# Altium PCB UBW32_MX460_v262.PcbDoc
Units mil, origin at the board's own origin, x right, y up, seen from the top; angles counter-clockwise.
Board outline 4390 x 1040 mil, 2 copper layers (Top, Bottom); 63 components, 100 nets, 331 pads, 96 vias.
Unrouted connection lines stored in the file: 49.
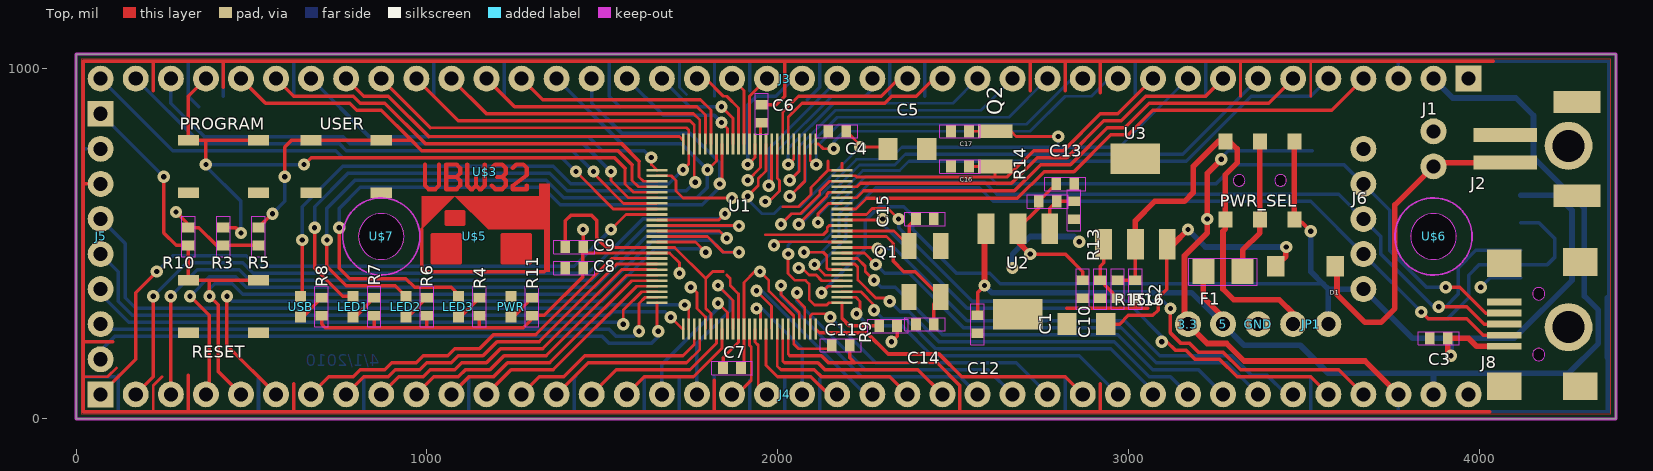
[diagram p0: Top view]
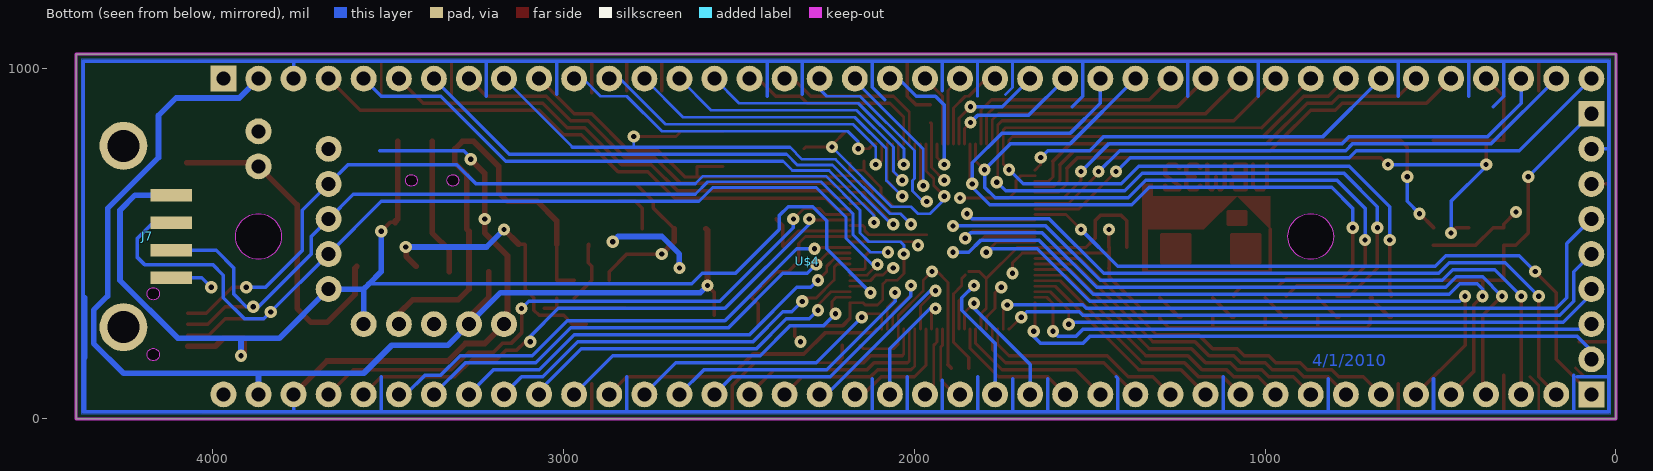
[diagram p1: Bottom view, seen from below]

## Layer stack, top to bottom
Top Solder: solder mask 0.4, Solder Resist, Dk 3.5
Top: signal copper 1.378
Dielectric 1: dielectric 12.6, FR-4, Dk 4.8
Bottom: signal copper 1.378
Bottom Solder: solder mask 0.4, Solder Resist, Dk 3.5

## Board outline
0,0 0,1040 4390,1040 4390,0
cut-out: 3870,455 ccw(c3870,520) 3935,520 ccw(c3870,520) 3870,585 ccw(c3870,520) 3805,520 ccw(c3870,520)
cut-out: 870,455 ccw(c870,520) 935,520 ccw(c870,520) 870,585 ccw(c870,520) 805,520 ccw(c870,520)
cut-out: 4170,165.68 ccw(c4170,183.39) 4187.72,183.39 ccw(c4170,183.39) 4170,201.1 ccw(c4170,183.39) 4152.28,183.39 ccw(c4170,183.39)
cut-out: 4170,338.89 ccw(c4170,356.61) 4187.72,356.61 ccw(c4170,356.61) 4170,374.32 ccw(c4170,356.61) 4152.28,356.61 ccw(c4170,356.61)
cut-out: 3315.94,663.27 ccw(c3315.94,680) 3332.67,680 ccw(c3315.94,680) 3315.94,696.73 ccw(c3315.94,680) 3299.21,680 ccw(c3315.94,680)
cut-out: 3434.06,663.27 ccw(c3434.06,680) 3450.79,680 ccw(c3434.06,680) 3434.06,696.73 ccw(c3434.06,680) 3417.33,680 ccw(c3434.06,680)

## Design rules (kind name [scope] priority, off if disabled: settings)
BoardOutlineClearance mdCopperDimension [All] p1: gap=10 ignorepadtopadclearanceinfootprint=FALSE except(0: Arc-SplitContinuation Track-SplitContinuation SMDPad-SplitContinuation THPad-SplitContinuation Via-SplitContinuation Fill-SplitContinuation Poly-SplitContinuation Region-SplitContinuation Text-SplitContinuation; 8: Poly-OutlineEdge Poly-CavityEdge Poly-CutoutEdge Poly-SplitBarrior)
Clearance Clearance_for_PolygonClass_Isolate_12 [InPolygonClass('Isolate_12') vs IsArc Or IsTrack Or IsPad Or IsVia Or IsFill Or IsRegion Or IsText] p1: gap=12 ignorepadtopadclearanceinfootprint=FALSE
Clearance "Clearance (Same Net)" [All] p2: gap=8 ignorepadtopadclearanceinfootprint=FALSE
Clearance [All] p3: gap=8 ignorepadtopadclearanceinfootprint=FALSE
HoleSize [All] p1: absolutevalues=TRUE maxlimit=100000 minlimit=15 maxpercent=80.000 minpercent=20.000
HoleToHoleClearance mdDrill [All] p1: gap=8 allowstackedmicrovias=TRUE
MinimumSolderMaskSliver [All] p1 off: minsoldermaskwidth=10
PasteMaskExpansion Expansion_SMDPaste_OFF [InPadClass('SMDPaste_OFF')] p1: expansion=0
PasteMaskExpansion mlMinCreamFrame [All] p2: expansion=0
PolygonConnect PolygonConnect_For_PolygonThermal_ON_Width100000_Gap100000 [InPolygonClass('PolygonThermal_ON_Width100000_Gap100000') vs Not IsVia] p1: connectstyle=Relief reliefconductorwidth=10 reliefentries=4 polygonreliefangle="90 Angle" airgapwidth=10
PolygonConnect ThermalVias [IsVia] p2: connectstyle=Direct reliefconductorwidth=10 reliefentries=4 polygonreliefangle="90 Angle" airgapwidth=10
PolygonConnect [All] p3: connectstyle=Relief reliefconductorwidth=10 reliefentries=4 polygonreliefangle="90 Angle" airgapwidth=10
RoutingVias [All] p1: holewidth=15 width=35 viastyle="Through Hole" minholewidth=15 minwidth=35 maxholewidth=100 maxwidth=100
SolderMaskExpansion mlMinStopFrame [All] p1: expansion=4 istentingtop=FALSE
Width [All] p1: maxlimit=10000 minlimit=8 preferedwidth=8
26 further rules are at their usual default settings.

## Classes and differential pairs
polygon class PolygonThermal_ON_Width100000_Gap100000: Polygon_1_Net_3.3V Polygon_1_Net_GND
polygon class Isolate_12: Polygon_1_Net_3.3V Polygon_1_Net_GND
pad class SMDPaste_OFF: U1-1 U1-2 U1-3 U1-4 U1-5 U1-6 U1-7 U1-8 U1-9 U1-10 U1-11 U1-12 U1-13 U1-14 U1-15 U1-16 U1-17 U1-18 U1-19 U1-20 U1-21 U1-22 U1-23 U1-24 U1-25 U1-26 U1-27 U1-28 U1-29 U1-30 U1-31 U1-32 U1-33 U1-34 U1-35 U1-36 U1-37 U1-38 U1-39 U1-40 U1-41 U1-42 U1-43 U1-44 U1-45 U1-46 U1-47 U1-48 U1-49 U1-50 U1-51 U1-52 U1-53 U1-54 U1-55 U1-56 U1-57 U1-58 U1-59 U1-60 U1-61 U1-62 U1-63 U1-64 U1-65 U1-66 U1-67 U1-68 U1-69 U1-70 U1-71 U1-72 U1-73 U1-74 U1-75 U1-76 U1-77 U1-78 U1-79 U1-80 U1-81 U1-82 U1-83 U1-84 U1-85 U1-86 U1-87 U1-88 U1-89 U1-90 U1-91 U1-92 U1-93 U1-94 U1-95 U1-96 U1-97 U1-98 U1-99 U1-100

## Components (designator, comment, footprint, x,y, rotation, side; value= is the part's Value field where it differs from the comment)
3.3 "" 1X01 3170,270 r0 top
5 "" 1X01 3270,270 r0 top
C1 "10uF" EIA3216 2880,270 r0 top
C2 "1uF" 0402-CAP 3020,370 r270 top
C3 "1uF" 0402-CAP 3885,230 r180 top
C4 "0.1uF" 0402-CAP 2170,820 r180 top
C5 "10uF" EIA3216 2370,770 r180 top
C6 "0.1uF" 0402-CAP 1955,870 r90 top
C7 "0.1uF" 0402-CAP 1870,145 r180 top
C8 "0.1uF" 0402-CAP 1420,430 r180 top
C9 "0.1uF" 0402-CAP 1420,490 r180 top
C10 "0.1uF" C0402 2870,370 r270 top
C11 "0.1uF" 0402-CAP 2180,210 r0 top
C12 "1uF" C0402 2570,270 r270 top
C13 "1uF" C0402 2820,670 r0 top
C14 "18pF" 0402-CAP 2420,270 r0 top
C15 "18pF" 0402-CAP 2420,570 r180 top
C16 "11pf" 0402-CAP 2520,720 r180 top
C17 "11pf" 0402-CAP 2520,820 r180 top
D1 "" SMA-DIODE 3505,435 r180 top
F1 "250mA PTC Fuse" R1206 3270,420 r180 top
GND "" 1X01 3370,270 r0 top
J1 "" 1X02 3870,820 r270 top
J2 "JST-2-PTH" S2B-PH 4220,770 r270 top
J3 "" 1X40 2020,970 r180 top
J4 "" 1X40 2020,70 r0 top
J5 "" 1X08 70,870 r270 top
J6 "" 1X05 3670,370 r90 top
J7 "" USB-A-S 4255,520 r180 bottom
J8 "USB-MINIB" USB-MINIB 4170,270 r180 top
JP1 "" 1X02 3470,270 r0 top
LED1 "WHITE" LED-0603 790,320 r0 top
LED2 "RED" LED-0603 940,320 r0 top
LED3 "YELLOW" LED-0603 1090,320 r0 top
PROGRAM "" TACTILE_SWITCH_SMD 420,720 r180 top
PWR "BLUE" LED-0603 1240,320 r0 top
PWR_SEL "AYZ0202" AYZ0202 3375,680 r0 top
Q1 "8MHz" CRYSTAL-SMD-5X3 2420,420 r90 top
Q2 "32.768KHz" CRYSTAL-32KHZ-SMD 2620,770 r270 top
R3 "10K" 0402-RES 420,520 r90 top
R4 "330" 0402-RES 1150,320 r270 top
R5 "10K" 0402-RES 520,520 r90 top
R6 "330" 0402-RES 1000,320 r270 top
R7 "330" 0402-RES 850,320 r270 top
R8 "330" 0402-RES 700,320 r270 top
R9 "10K" 0402-RES 2315,265 r0 top
R10 "10K" 0402-RES 320,520 r270 top
R11 "330" 0402-RES 1300,320 r270 top
R13 "390" 0402-RES 2845,595 r90 top
R14 "240" 0402-RES 2770,620 r0 top
R15 "715" 0402-RES 2920,370 r90 top
R16 "240" 0402-RES 2970,370 r270 top
RESET "" TACTILE_SWITCH_SMD 420,320 r180 top
U1 "" TQFP100 1920,520 r270 top
U2 "3.3V" SOT223 2685,420 r180 top
U3 "5V" SOT223 3020,620 r0 top
U$3 "" UBW32 1165,705 r0 top
U$4 "" SFE-NEW-WEBLOGO 2305,450 r180 bottom
U$5 "" SCHMALZHAUS 1135,520 r0 top
U$6 "" STAND-OFF 3870,520 r0 top
U$7 "" STAND-OFF 870,520 r0 top
USB "GREEN" LED-0603 640,320 r0 top
USER "" TACTILE_SWITCH_SMD 770,720 r180 top

## Footprints (in the part's own frame and the unit in brackets; to place one, negate y for a bottom-side part, rotate by r counter-clockwise, add the part's x,y. Pads: shape width x height; smd on the part's side, far side on the other; paste and mask are expansions set on the pad)
1X01 [mil] "1X01"
  round 74 hole 40: 1(0,0)
  body extent -37,-37 37,37, height 150
1X02 [mil] "1X02"
  round 74 hole 40: 1(0,0) 2(100,0)
  body extent -37,-37 137,37, height 150
1X05 [mil] "1X05"
  round 74 hole 40: 1(0,0) 2(100,0) 3(200,0) 4(300,0) 5(400,0)
  body extent -37,-37 437,37, height 150
1X08 [mil] "1X08"
  rect 74x74 / inner round 68.37 / far side rect 74x74 hole 40: 1(0,0)
  round 74 hole 40: 2(100,0) 3(200,0) 4(300,0) 5(400,0) 6(500,0) 7(600,0) 8(700,0)
  body extent -34,-37 737,37, height 150
1X40 [mil] "1X40"
  rect 74x74 / inner round 68.37 / far side rect 74x74 hole 40: 1(-1950,0)
  round 74 hole 40: 2(-1850,0) 3(-1750,0) 4(-1650,0) 5(-1550,0) 6(-1450,0) 7(-1350,0) 8(-1250,0) 9(-1150,0) 10(-1050,0) 11(-950,0) 12(-850,0) 13(-750,0) 14(-650,0) 15(-550,0) 16(-450,0) 17(-350,0) 18(-250,0) 19(-150,0) 20(-50,0) 21(50,0) 22(150,0) 23(250,0) 24(350,0) 25(450,0) 26(550,0) 27(650,0) 28(750,0) 29(850,0) 30(950,0) 31(1050,0) 32(1150,0) 33(1250,0) 34(1350,0) 35(1450,0) 36(1550,0) 37(1650,0) 38(1750,0) 39(1850,0) 40(1950,0)
  body extent -1984,-37 1987,37, height 150
0402-CAP [mm] "0402-CAP"
  rect 0.7x0.9 smd: 1(-0.65,0) 2(0.65,0)
  Top keep-out lines w0.051: 1.473,-0.483 -1.473,-0.483 -1.473,0.483 1.473,0.483 1.473,-0.483
  body extent -1.5,-0.51 1.5,0.51, height 3.81
0402-RES [mm] "0402-RES"
  rect 0.7x0.9 smd: 1(-0.65,0) 2(0.65,0)
  Top keep-out lines w0.051: -1.473,0.483 -1.473,-0.483 1.473,-0.483 1.473,0.483 -1.473,0.483
  body extent -1.5,-0.51 1.5,0.51, height 3.81
AYZ0202 [mm] "AYZ0202"
  rect 1x1.15 smd: 1(-2.5,2.825) 2(0,2.825) 3(2.5,2.825) 4(-2.5,-2.825) 5(0,-2.825) 6(2.5,-2.825)
  body extent -3,-3.4 3,3.4, height 1.27
C0402 [mm] "C0402"
  rect 0.7x0.9 smd: 1(-0.65,0) 2(0.65,0)
  Top keep-out lines w0.051: 1.473,-0.483 -1.473,-0.483 -1.473,0.483 1.473,0.483 1.473,-0.483
  body extent -1.5,-0.51 1.5,0.51, height 3.81
CRYSTAL-32KHZ-SMD [mm] "CRYSTAL-32KHZ-SMD"
  rect 1x2.5 smd: X1(-1.27,0) X2(1.27,0)
  body extent -1.77,-1.25 1.77,1.25, height 1.27
CRYSTAL-SMD-5X3 [mil] "CRYSTAL-SMD-5X3"
  rect 74.8x43.31 smd: 1(-72.83,-45.28) 2(72.83,-45.28) 3(72.83,45.28) 4(-72.83,45.28)
  body extent -110,-67 110,67, height 50
EIA3216 [mil] "EIA3216"
  rect 55.12x62.99 smd: A(55.12,0) C(-55.12,0)
  body extent -83,-31 83,31, height 50
LED-0603 [mil] "LED-0603"
  rect 31.5x31.5 smd: A(0,-29.53) C(0,29.53)
  body extent -16,-45 16,45, height 50
R1206 [mil] "R1206"
  rect 62.99x70.98 smd: 1(-55.98,0) 2(55.98,0)
  Top keep-out lines w2: 97.36,38.7 97.36,-38.7 -97.36,-38.7 -97.36,38.7 97.36,38.7
  body extent -98,-40 98,40, height 150
S2B-PH [mm] "S2B-PH"
  rect 1x4.6 smd: 1(-1,-3.7) 2(1,-3.7)
  rect 1.6x3.4 smd: NC1(-3.4,1.5) NC2(3.4,1.5)
  body extent -4.2,-6 4.2,3.2, height 3.81
SCHMALZHAUS [mil] "SCHMALZHAUS"
  Top region: -60,115 -150,115 -150,20 -55,115 -60,115
  Top region: -55,115 40,20 200,20 200,-100 215,-100 215,150 185,150 185,115 -55,115
  Top region: 80,-75 80,5 160,5 160,-75
  Top region: -120,-75 -120,5 -40,5 -40,-75
  Top region: -80,35 -80,70 -30,70 -30,35
  Top lines w10: -150,20 -150,-100 200,-100 ; -120,-75 -40,-75 -40,5 -120,5 -120,-75 ; -80,35 -30,35 -30,70 -80,70 -80,35 ; 80,-75 160,-75 160,5 80,5 80,-75
  body extent -155,-105 215,150, height 150
SFE-NEW-WEBLOGO [mil] "SFE-NEW-WEBLOGO"
SMA-DIODE [mil] "SMA-DIODE"
  rect 50x57.87 smd: A(-84.65,0) C(84.65,0)
  body extent -110,-29 110,29, height 50
SOT223 [mil] "SOT223"
  rect 48x88 smd: 1(-91,-122) 2(0,-122) 3(91,-122)
  rect 141.73x86.61 smd: 4(0,122.01)
  body extent -115,-166 115,165, height 150
STAND-OFF [mil] "STAND-OFF"
  Top keep-out circle w5: c0,0 r110
  body extent -113,-113 113,113, height 150
TACTILE_SWITCH_SMD [mil] "TACTILE_SWITCH_SMD"
  rect 60x30 smd: 1(-100,75) 2(100,75) 3(-100,-75) 4(100,-75)
  body extent -130,-104 130,104, height 150
TQFP100 [mm] "TQFP100"
  rect 0.2x1.5 smd paste+0: 1(-4.8,-6.7) 2(-4.4,-6.7) 3(-4,-6.7) 4(-3.6,-6.7) 5(-3.2,-6.7) 6(-2.8,-6.7) 7(-2.4,-6.7) 8(-2,-6.7) 9(-1.6,-6.7) 10(-1.2,-6.7) 11(-0.8,-6.7) 12(-0.4,-6.7) 13(0,-6.7) 14(0.4,-6.7) 15(0.8,-6.7) 16(1.2,-6.7) 17(1.6,-6.7) 18(2,-6.7) 19(2.4,-6.7) 20(2.8,-6.7) 21(3.2,-6.7) 22(3.6,-6.7) 23(4,-6.7) 24(4.4,-6.7) 25(4.8,-6.7) 51(4.8,6.7) 52(4.4,6.7) 53(4,6.7) 54(3.6,6.7) 55(3.2,6.7) 56(2.8,6.7) 57(2.4,6.7) 58(2,6.7) 59(1.6,6.7) 60(1.2,6.7) 61(0.8,6.7) 62(0.4,6.7) 63(0,6.7) 64(-0.4,6.7) 65(-0.8,6.7) 66(-1.2,6.7) 67(-1.6,6.7) 68(-2,6.7) 69(-2.4,6.7) 70(-2.8,6.7) 71(-3.2,6.7) 72(-3.6,6.7) 73(-4,6.7) 74(-4.4,6.7) 75(-4.8,6.7)
  rect 1.5x0.2 smd paste+0: 26(6.7,-4.8) 27(6.7,-4.4) 28(6.7,-4) 29(6.7,-3.6) 30(6.7,-3.2) 31(6.7,-2.8) 32(6.7,-2.4) 33(6.7,-2) 34(6.7,-1.6) 35(6.7,-1.2) 36(6.7,-0.8) 37(6.7,-0.4) 38(6.7,0) 39(6.7,0.4) 40(6.7,0.8) 41(6.7,1.2) 42(6.7,1.6) 43(6.7,2) 44(6.7,2.4) 45(6.7,2.8) 46(6.7,3.2) 47(6.7,3.6) 48(6.7,4) 49(6.7,4.4) 50(6.7,4.8) 76(-6.7,4.8) 77(-6.7,4.4) 78(-6.7,4) 79(-6.7,3.6) 80(-6.7,3.2) 81(-6.7,2.8) 82(-6.7,2.4) 83(-6.7,2) 84(-6.7,1.6) 85(-6.7,1.2) 86(-6.7,0.8) 87(-6.7,0.4) 88(-6.7,0) 89(-6.7,-0.4) 90(-6.7,-0.8) 91(-6.7,-1.2) 92(-6.7,-1.6) 93(-6.7,-2) 94(-6.7,-2.4) 95(-6.7,-2.8) 96(-6.7,-3.2) 97(-6.7,-3.6) 98(-6.7,-4) 99(-6.7,-4.4) 100(-6.7,-4.8)
  body extent -7.45,-7.45 7.45,7.45, height 3.81
UBW32 [mil] "UBW32"
  Top lines w12: -170,20 -170,-40 -160,-50 -140,-50 -130,-40 -130,20 ; -50,20 -50,-40 -40,-50 -35,-50 -25,-40 ; -25,-15 -25,-40 ; 0,20 0,-40 -10,-50 -15,-50 -25,-40 ; 20,-40 30,-50 50,-50 60,-40 60,-25 50,-15 ; 20,10 30,20 50,20 60,10 60,-5 50,-15 ; 35,-15 50,-15 ; 80,10 90,20 110,20 120,10 120,-10 80,-40 80,-50 120,-50 120,-40 ; -110,-15 -80,-15 ; -110,-15 -110,-50 -80,-50 -70,-40 -70,-25 -80,-15 ; -110,-15 -110,20 -80,20 -70,10 -70,-5 -80,-15
  body extent -176,-56 126,26, height 150
USB-A-S [mil] "USB-A-S"
  rect 118.11x35.43 smd: D+(135.83,-39.37) D-(135.83,39.37) GND(135.83,-118.11) VBUS(135.83,118.11)
  round 136.5 hole 91: P$5(0,-258.5) P$6(0,258.5)
  body extent -69,-327 195,327, height 50
USB-MINIB [mm] "USB-MINIB"
  rect 2.5x0.5 smd: D+(2.5,0) D-(2.5,0.8) GND(2.5,-1.6) ID(2.5,-0.8) VBUS(2.5,1.6)
  rect 2.5x2 smd: G1(-3,4.5) G2(2.5,4.5) G3(-3,-4.5) G4(2.5,-4.4)
  body extent -4.25,-5.5 3.75,5.5, height 1.27

## Part data
3.3 5 GND: library part 1X01, PackageName=1X01
C1 C5: library part EIA3216, PackageName=EIA3216
C2 C3 C4 C6 C7 C8 C9 C11 C14 C15 C16 C17: library part 0402-CAP, PackageName=0402-CAP
C10 C12 C13: library part C0402, PackageName=C0402
D1: library part SMA-DIODE, PackageName=SMA-DIODE
F1: library part R1206, PackageName=R1206
J1 JP1: library part 1X02, PackageName=1X02
J2: library part S2B-PH, PackageName=S2B-PH
J3 J4: library part 1X40, PackageName=1X40
J5: library part 1X08, PackageName=1X08
J6: library part 1X05, PackageName=1X05
J7: library part USB-A-S, PackageName=USB-A-S
LED1 LED2 LED3 PWR USB: library part LED-0603, PackageName=LED-0603
PROGRAM RESET USER: library part TACTILE_SWITCH_SMD, PackageName=TACTILE_SWITCH_SMD
Q1: library part CRYSTAL-SMD-5X3, PackageName=CRYSTAL-SMD-5X3
Q2: library part CRYSTAL-32KHZ-SMD, PackageName=CRYSTAL-32KHZ-SMD
R3 R4 R5 R6 R7 R8 R9 R10 R11 R13 R14 R15 R16: library part 0402-RES, PackageName=0402-RES
U1: library part TQFP100, PackageName=TQFP100
U2 U3: library part SOT223, PackageName=SOT223
U$3: library part UBW32, PackageName=UBW32
U$4: library part SFE-NEW-WEBLOGO, PackageName=SFE-NEW-WEBLOGO
U$5: library part SCHMALZHAUS, PackageName=SCHMALZHAUS
U$6 U$7: library part STAND-OFF, PackageName=STAND-OFF
J8: PackageName=USB-MINIB
PWR_SEL: PackageName=AYZ0202

## Free pads (board coordinates)
  round 130 hole 130 unplated: MH1(870,520) MH1(3870,520)
  round 33.46 hole 33.46 unplated: MH1(3434.06,680) MH2(3315.94,680)
  round 35.43 hole 35.43 unplated: MH1(4170,183.39) MH2(4170,356.61)

## Via types
v1: diameter 35/35 (per signal layer), hole 15, Top to Bottom, 96 vias

## Nets (pads, with @x,y where several pads share a name; then routed paths per layer and width w, separated by ;. In a path a pad name is that pad's centre, name@x,y a point inside that pad or via, vN(x,y) a via of type N, cw(c..) or ccw(c..) an arc to the next point about the centre after c; other vN are vias at no path point)
3.3V: 3.3.1 C6.1 C7.1 C8.1 C9.1 C10.1 C11.1 C13.1 J3.3 J4.38 J5.2 R3.1 R4.2 R5.1 R6.2 R7.2 R8.2 R9.2 R10.1 R11.2 R14.1 U1.2 U1.16 U1.30 U1.37 U1.46 U1.55 U1.62 U1.86 U2.2 | length 19300.2
  Top w8: C9.1@1447.76,472.76 U1.16 1692.24,472.76 1720,445 v1(1720,415) ; U1.2 1696.77,693.23 1710,680 1710,650 1730,630 v1(1870,630) ; v1(1752.5,375) 1755,375 1770,360 1770,315 1794.02,290.98 U1.30 ; C7.1@1904.25,154.25 U1.37 1904.25,389.25 1935,420 v1(1950,420) 1975,395 1975,365 2045.98,294.02 U1.46 2045.98,214.02 2060,200 2145,200 2155,210 C11.1 ; v1(1915,680) 1951.5,716.5 U1.86 1951.5,840.91 cw(c1955,840.91) C6.1 ; v1(1990,495) 2000,505 2145,505 2145.75,504.25 U1.62 ; v1(2060,430) 2070,430 2090,410 2110,410 2125.98,394.02 U1.55
  Top w10: v1(285,590) 320,555 R10.1 320.59,545 350,545 400.59,494.41 R3.1 R5.1 ; R8.2 700,270.61 710.61,260 850,260 ; R7.2 850,260 ; R6.2 1000,260 ; R4.2 1150,260 ; v1(1445,540) 1445.59,539.41 C9.1 1445,490 1445,470 ; C8.1 C8.1@1445,430 ; C9.1@1447.76,472.76 1445,470 ; C7.1 1895,145 C7.1@1904.25,154.25 ; v1(2325,220) 2340.59,235.59 R9.2 ; U2.2 2744.41,601.41 R14.1 C13.1 ; v1(2720,470) 2820,470 2870,420 C10.1 C10.1@2869.41,395 ; 850,260 1000,260 ; 1000,260 1150,260 ; 1150,260 1275,260 1300,285 R11.2 1300,295 1335,295 1445,405 C8.1@1445,430 ; C8.1@1445,430 1445,470
  Top w16: U2.2 2685,505 v1(2720,470) ; v1(3265,740) 3225,700 v1(3225,570) 3225,530 3160,465 3160,280 3.3.1 3225,215 3280,215 3330,165 3675,165 J4.38
  Bottom w8: 1720,1020 1720,945 1740,925 ; 1820,920 1820,1020
  Bottom w10: J5.2@80,770 20,770 ; 110,120 20,120 ; 120,125 120,20 ; 350,890 320,920 320,1020 ; 420,920 420,1020 ; 520,115 520,20 ; 620,920 620,1020 ; 820,115 820,20 ; 1020,920 1020,1020 ; 1120,120 1120,20 ; 1220,920 1220,1020 ; 1425,120 1420,115 1420,20 ; 1550,890 1520,920 1520,1020 ; 1620,115 1620,20 ; 1720,115 1720,20 ; 1820,120 1820,20 ; 1920,110 1920,20 ; 1920,935 1920,1020 ; 2020,120 2020,20 ; 2085,910 2120,945 2120,1020 ; 2120,115 2120,20 ; 2320,925 2320,1020 ; 2420,920 2420,1020 ; 2820,120 2820,20 ; 3020,925 3020,1020 ; 3220,920 3220,1020 ; v1(3265,740) 3265,745 3285,765 3525,765 ; 3520,120 3520,20 ; J4.38 3770,20 ; J3.3@3770,950 3770,1020 ; 4365,175 4365,25 4370,20 ; 20,120 20,770 ; 20,120 20,20 120,20 ; 20,770 20,1020 320,1020 ; 120,20 520,20 ; 320,1020 420,1020 ; 420,1020 620,1020 ; 520,20 820,20 ; 620,1020 1020,1020 ; 820,20 1120,20 ; 1020,1020 1220,1020 ; 1120,20 1420,20 ; 1220,1020 1520,1020 ; 1420,20 1620,20 ; 1520,1020 1720,1020 1820,1020 1920,1020 ; 1620,20 1720,20 ; 1720,20 1820,20 ; 1820,20 1920,20 ; 1920,20 2020,20 ; 1920,1020 2120,1020 ; 2020,20 2120,20 ; 2120,20 2820,20 ; 2120,1020 2320,1020 ; 2320,1020 2420,1020 ; 2420,1020 3020,1020 ; 2820,20 3520,20 ; 3020,1020 3220,1020 ; 3220,1020 3770,1020 ; 3520,20 3770,20 ; 3770,20 4370,20 ; 3770,1020 4370,1020 4370,20
  Bottom w16: 4365,175 4365,345
5V: 5.1 C12.1 F1.2 J3.2 J4.39 U2.3 | length 3435.5
  Top w10: C12.1 2570,360 v1(2590,380)
  Top w16: v1(2590,380) 2590,538 U2.3 ; F1.2 3214.02,345.98 3270,290 5.1
  Bottom w10: 3870,125 3875,130
  Bottom w16: v1(2590,380) 2610,360 3180,360 5.1 3330,210 3490,210 3570,130 3875,130 4255,130 4340,215 4340,310 4300,350 4300,600 4155,745 4155,865 4105,915 3925,915 J3.2 ; J4.39 3870,125
5V_ALT: C2.1 JP1.1 PWR_SEL.1 PWR_SEL.4 R16.1 U3.2 | length 1334.4
  Top w10: R16.1 C2.1 U3.2 U3.2@3020,495
  Top w16: U3.2 3020,565 3075,620 3160,620 3185,645 3185,720 3256.22,791.22 PWR_SEL.1 3288.78,791.22 3310,770 3310,730 3276.57,696.57 PWR_SEL.4 3276.57,541.57 3270,535 3270,370 3300,340 3430,340 3470,300 JP1.1
D+: J6.3 J7.D+ J8.D+ U1.57 | length 2806.9
  Top w8: v1(2075,475) 2130,475 2140,465 2140,430 2144.49,425.51 U1.57
  Top w10: v1(3885,320) 3965,320 4015,270 J8.D+
  Bottom w8: v1(2075,475) 2125,475 2175,525 2175,585 2266,676 2589,676 2625,640
  Bottom w10: 2625,640 3600,640 J6.3 3720,520 3720,470 3870,320 v1(3885,320) 3905,320 3940,355 3940,430 3990.63,480.63 J7.D+
D-: J6.2 J7.D- J8.D- U1.56 | length 3026.8
  Top w8: v1(2105,440) 2135.24,409.76 U1.56
  Top w10: v1(3835,305) 3855,285 3965,285 4011.5,238.5 J8.D-
  Bottom w8: v1(2105,440) 2120,440 2195,515 2195,575 2280,660 2420,660 2575,660 2615,620
  Bottom w10: 2615,620 3520,620 J6.2 v1(3835,305) 3855,285 3910,285 3970,345 3970,410 4000,440 4195,440 4215,460 4215,515 4170.63,559.37 J7.D-
GND: C1.C C2.2 C3.2 C4.2 C5.C C6.2 C7.2 C8.2 C9.2 C10.2 C11.2 C12.2 C13.2 C14.1 C15.1 C16.2 C17.2 GND.1 J1.1 J2.1 J3.1 J4.40 J5.3 J6.5 J7.GND J8.G1 J8.G2 J8.G3 J8.G4 J8.GND PROGRAM.1 PROGRAM.2 PWR.C R13.1 R15.1 RESET.1 RESET.2 U1.15 U1.31 U1.36 U1.45 U1.65 U1.75 USER.1 USER.2 | length 13577.9
  Top w8: 20,120 90,120 115,145 ; 220,20 220,95 245,120 ; 1500,500 1511.5,488.5 U1.15 1706.5,488.5 1795,400 ; U1.31 1809.76,300.24 1795,315 1795,400 ; 1845,175 1888.5,218.5 U1.36 1888.5,356.5 1865,380 1865,400 1855,410 ; 1845,420 1815,420 1795,400 ; 1965,525 2130,525 2141.5,536.5 2141.5,545.86 2147.13,551.5 U1.65 ; 2015,605 2060,605 2095,640 2095,660 2143.98,708.98 ; U1.45 2030.24,184.76 2035,180 ; 2143.98,735.43 2143.98,708.98 ; 2145,160 2455,160 ; 2183.78,728.78 U1.75 2143.98,708.98 ; 3320,920 3320,1020 ; 3520,920 3520,1020
  Top w10: J5.3@75,670 20,670 ; 105,220 20,220 ; 220,935 220,1020 ; 320,125 320,20 ; 420,945 420,1020 ; 620,100 620,20 ; C9.2 1394.41,564.41 1410,580 1470,580 1485,565 1485,515 1500,500 ; 1820,110 1820,20 ; C7.2 1845,145 1845,175 ; C6.2 1995.59,895.59 2020,920 2020,1020 ; 2035,180 2125,180 2145,160 2220,160 2205.59,174.41 C11.2 ; 2455,160 2520,95 2520,20 ; 2720,935 2720,1020 ; 2820,935 2820,1020 ; 2825,315 3020,315 ; 2920,100 2920,20 ; 2920,930 2920,1020 ; C2.2 3020,315 ; 3055,315 3020,315 ; 4030,20 2920,20 ; 4040,1020 3520,1020 3320,1020 2920,1020 ; 20,220 20,670 ; 20,220 20,120 20,20 220,20 320,20 ; 20,670 20,1020 220,1020 ; 220,1020 420,1020 ; 320,20 620,20 ; 420,1020 2020,1020 ; 620,20 1820,20 ; 1820,20 2520,20 ; 2020,1020 2720,1020 ; 2520,20 2920,20 ; 2720,1020 2820,1020 ; 2820,1020 2920,1020
  Bottom w10: v1(4005,375) 4031.89,401.89 J7.GND
  Bottom w16: v1(2670,430) 2670,470 2720,520 2845,520 v1(2860,505)
N$1: D1.A J1.2 J2.2 | length 956.2
  Top w16: D1.A 3595,429.65 3595,355 3675,275 3720,275 3760,315 3760,610 J1.2 3880.63,730.63 J2.2
N$2: F1.1 PWR_SEL.2 PWR_SEL.5 | length 391.5
  Top w16: F1.1 3325.98,480.98 3375,530 PWR_SEL.5 PWR_SEL.2
N$3: R13.2 R14.2 U2.1 | length 135.8
  Top w10: U2.1 2776,600.41 R14.2 2844.41,620 R13.2
N$4: R15.2 R16.2 U3.1 | length 185.9
  Top w10: U3.1@2929,491 U3.1 2930,497 2930,445 2920,435 R15.2 2920,395 2945,370 2945,369.41 R16.2
N$6: PWR.A R11.1 | length 83.2
  Top w10: PWR.A 1245.47,290.47 1300,345 R11.1
N$20: R8.1 USB.A | length 92.8
  Top w10: USB.A 645.47,290.47 700,345 695,345 695.59,345.59 R8.1
N$22: LED1.A R7.1 | length 83.2
  Top w10: LED1.A 795.47,290.47 850,345 R7.1
N$23: LED2.A R6.1 | length 83.2
  Top w10: LED2.A 945.47,290.47 1000,345 R6.1
N$35: LED3.A R4.1 | length 83.2
  Top w10: LED3.A 1095.47,290.47 1150,345 R4.1
N$110: C4.1 C5.A U1.85 | length 739
  Top w8: v1(1915,635) 1945,665 1945,685 1967.24,707.24 U1.85 ; C4.1 2235,780.59 v1(2235,775) 2309.88,775 C5.A
  Bottom w8: v1(1915,635) 1915,625 1955,585 1990,585 2010,605 2065,605 v1(2235,775)
OSC1: C14.2 Q1.1 U1.63 | length 467.7
  Top w8: U1.63 2310,520 2330,500
  Top w10: 2330,500 2330,450 2360,420 2392.44,420 Q1.1 2445.59,327.48 C14.2
OSC2: C15.2 Q1.3 U1.64 | length 294
  Top w8: U1.64 2331.81,535.75 Q1.3
  Top w10: Q1.3 2374.72,550.32 C15.2
PGC: J5.5 U1.26 | length 1807.9
  Top w8: v1(1695,290) 1728.98,256.02 1731.02,256.02 U1.26
  Bottom w10: J5.5 120,420 120,335 160,295 1520,295 1530,305 1680,305 v1(1695,290)
PGD: J5.4 U1.27 | length 1939.2
  Top w8: v1(1735,325) 1735,323.54 1746.77,311.77 U1.27
  Bottom w10: J5.4 140,500 140,345 170,315 1510,315 1520,325 v1(1735,325)
RA0: J4.7 U1.17 | length 1146.5
  Top w8: 1310,240 1527.01,457.01 U1.17
  Top w10: J4.7 720,120 790,120 810,140 880,140 900,160 970,160 990,180 1060,180 1080,200 1150,200 1190,240 1310,240
RA1: J4.19 U1.38 | length 219.9
  Top w8: J4.19 1885,70 1925,110 1925,205 1920,210 U1.38
RA2: J4.32 U1.58 | length 1161.2
  Top w8: U1.58 2219.91,441.26 2228.74,432.43 2228.74,396.26 2280,345 2310,345 v1(2320,335)
  Bottom w10: v1(2320,335) 2350,305 2375,305 2460,220 2960,220 3060,120 3120,120 J4.32
RA3: J4.33 U1.59 | length 1255.3
  Top w8: U1.59 2227.99,457.01 2250,435 2250,420 v1(2275,395)
  Bottom w10: v1(2275,395) 2295,375 2335,375 2470,240 2970,240 3070,140 3200,140 J4.33
RA4: J4.34 U1.60 | length 1353
  Top w8: U1.60 2247.24,472.76 v1(2280,440)
  Bottom w10: v1(2280,440) 2305,415 2375,415 2530,260 2980,260 3080,160 3280,160 J4.34
RA5: J4.35 U1.61 | length 1459.6
  Top w8: U1.61 2281.5,488.5 v1(2285,485)
  Bottom w10: v1(2285,485) 2335,485 2540,280 2990,280 3090,180 3295,180 3350,125 3395,125 3450,70 J4.35
RA6: J3.24 U1.91 | length 322.9
  Top w8: v1(1840,890) 1872.76,857.24 U1.91
  Bottom w10: J3.24 1750,890 v1(1840,890)
RA7: J3.25 U1.92 | length 390
  Top w8: v1(1840,845) 1857.01,827.99 U1.92
  Bottom w10: J3.25 1675,865 1820,865 v1(1840,845)
RA9: J4.13 U1.28 | length 595.3
  Top w8: 1730,180 1762.52,212.52 U1.28
  Top w10: J4.13 1320,120 1390,120 1450,180 1730,180
RA10: J4.14 U1.29 | length 519.4
  Top w8: 1740,160 1778.27,198.27 U1.29
  Top w10: J4.14 1460,160 1740,160
RA14: J4.36 U1.66 | length 1612
  Top w8: U1.66 2297.24,567.24 v1(2300,570)
  Top w10: v1(3095,220) 3110,220 3135,195 3165,195 3190,170 3260,170 3310,120 3520,120 J4.36
  Bottom w10: v1(2300,570) 2300,555 2540,315 3015,315 3095,235 v1(3095,220)
RA15: J4.37 U1.67 | length 1768.4
  Top w8: U1.67 2252.99,582.99 2270,600 2315,600 v1(2345,570)
  Top w10: v1(3120,315) 3120,245 3150,215 3175,215 3200,190 3270,190 3320,140 3600,140 J4.37
  Bottom w10: v1(2345,570) 2345,545 2555,335 3100,335 v1(3120,315)
RB0: J5.8 U1.25 | length 1745.7
  Top w8: U1.25 1656.22,253.78 v1(1660,250)
  Bottom w10: J5.8 70,195 110,235 1500,235 1520,215 1640,215 1660,235 v1(1660,250)
RB1: J5.7 U1.24 | length 1693.3
  Top w8: v1(1605,250) 1605,329 1622.77,346.77 U1.24
  Bottom w10: J5.7 85,255 1520,255 1540,235 1590,235 v1(1605,250)
RB2: J5.6 U1.23 | length 1698.2
  Top w8: v1(1560,270) 1560,310 1612.52,362.52 U1.23
  Bottom w10: J5.6 70,355 150,275 1555,275 v1(1560,270)
RB3: J4.12 U1.22 | length 613.9
  Top w8: 1360,140 1598.27,378.27 U1.22
  Top w10: J4.12 1240,140 1360,140
RB4: J4.11 U1.21 | length 720.4
  Top w8: 1350,160 1584.02,394.02 U1.21
  Top w10: J4.11 1120,120 1190,120 1230,160 1350,160
RB5: J4.10 U1.20 | length 827
  Top w8: 1340,180 1569.76,409.76 U1.20
  Top w10: J4.10 1020,120 1090,120 1110,140 1180,140 1220,180 1340,180
RB8: J4.15 U1.32 | length 456.5
  Top w8: 1750,140 1825.51,215.51 U1.32
  Top w10: J4.15 1540,140 1750,140
RB9: J4.16 U1.33 | length 380.6
  Top w8: 1760,120 1841.26,201.26 U1.33
  Top w10: J4.16 1620,120 1760,120
RB10: J4.17 U1.34 | length 411.2
  Top w8: v1(1830,330) 1857.01,302.99 U1.34
  Bottom w10: J4.17 1670,155 1830,315 v1(1830,330)
RB11: J4.18 U1.35 | length 505.3
  Top w8: v1(1830,380) 1872.76,337.24 U1.35
  Bottom w10: J4.18 1770,215 1865,310 1865,345 v1(1830,380)
RB12: J4.22 U1.41 | length 340.5
  Top w8: U1.41 1967.24,152.76 2000,120
  Top w10: 2000,120 2095,120 2145,70 J4.22
RB13: J4.23 U1.42 | length 578.8
  Top w8: v1(1940,365) 1982.99,322.01 U1.42
  Bottom w10: v1(1940,365) 1955,365 1970,350 2250,70 J4.23
RB14: J4.24 U1.43 | length 509.9
  Top w8: U1.43 1998.74,151.26 2010,140
  Top w10: 2010,140 2105,140 2125,120 2320,120 J4.24
RB15: J4.25 U1.44 | length 585.8
  Top w8: U1.44 2014.49,165.51 2020,160
  Top w10: 2020,160 2115,160 2135,140 2400,140 J4.25
RC1: J3.38 U1.6 | length 1582.6
  Top w8: v1(1525,705) 1525,680 1574.76,630.24 U1.6
  Bottom w10: J3.38 270,900 365,805 435,805 760,805 780,785 1445,785 v1(1525,705)
RC2: J3.39 U1.7 | length 1636.4
  Top w8: v1@1480,695 1560.51,614.49 U1.7
  Top w10: v1(1475,705) 1475,700 v1@1480,695
  Bottom w10: J3.39 355,785 750,785 770,765 1415,765 v1(1475,705)
RC3: J3.40 U1.8 | length 1740
  Top w8: v1(1425,705) 1531.26,598.74 U1.8
  Bottom w10: J3.40 275,765 740,765 760,745 1385,745 v1(1425,705)
RC4: J4.1 U1.9 | length 1934.9
  Top w8: v1(1525,540) 1567.99,582.99 U1.9
  Top w10: J4.1 170,170 170,360 v1(230,420)
  Bottom w10: v1(230,420) 275,465 485,465 515,435 1420,435 v1(1525,540)
RC13: C17.1 J3.9 Q2.X1 U1.73 | length 1852.9
  Top w8: v1(2010,555) 2040,585 2065,585 2120,640 2120,650 2147.48,677.48 U1.73 ; C17.1 Q2.X1 2665,820 2680,805 v1(2800,805)
  Bottom w8: v1(2010,555) 2040,585 2070,585 2225,740 2320,740 2355,775 ; 2800,775 v1(2800,805) ; 2975,775 J3.9
  Bottom w10: 2355,775 2800,775 2975,775
RC14: C16.1 J3.10 Q2.X2 U1.74 | length 1107.9
  Top w8: U1.74 2221.77,693.23 2225,690 2620,690 ; C16.1 Q2.X2 2620,690 ; 2655,690 2620,690
  Top w10: 2655,690 2730,765 2815,765 2920,870 2970,870 J3.10
RD0: J3.8 U1.72 | length 1213.9
  Top w8: U1.72 2226.73,661.73 2236.73,671.73
  Top w10: 2236.73,671.73 2666.73,671.73 2740,745 2825,745 2930,850 2980,850 3050,920 3220,920 J3.8
RD1: J3.11 U1.76 | length 961.3
  Top w8: U1.76 2116.22,783.78 2130,770 v1(2160,770)
  Bottom w8: v1(2160,770) 2160,790 2190,820 2720,820 2820,920 2895,920 2945,970 J3.11
RD2: J3.12 U1.77 | length 959.4
  Top w8: U1.77 2093.23,736.77 2105,725 v1(2110,725)
  Bottom w8: v1(2110,725) 2110,775 2175,840 2710,840 2840,970 J3.12
RD3: J3.13 U1.78 | length 1092.9
  Top w8: v1(2035,635) 2077.48,677.48 U1.78
  Bottom w8: v1(2035,635) 2080,680 2080,770 2170,860 2660,860 J3.13
RD4: J3.16 U1.81 | length 561.7
  Top w8: U1.81 2030.24,860.24 2070,900
  Top w10: 2070,900 2305,900 2325,920 2395,920 2445,970 J3.16
RD5: J3.17 U1.82 | length 485.8
  Top w8: U1.82 2014.49,874.49 2060,920
  Top w10: 2060,920 2295,920 2345,970 J3.17
RD6: J3.18 U1.83 | length 730.8
  Top w8: v1(1965,620) 1975,620 2005,650 2005,680 1998.74,686.26 U1.83
  Bottom w8: v1(1965,620) 1975,620 2005,650 2005,680 2000,685 2000,765 2155,920 2250,920 J3.18@2270,940
  Bottom w10: J3.18@2270,940 J3.18
RD7: J3.19 U1.84 | length 508.4
  Top w8: v1(1975,665) 1975.98,665 1982.99,672.01 U1.84
  Bottom w8: v1(1975,665) 1975,770 J3.19@2170,965
  Bottom w10: J3.19@2170,965 J3.19
RD8: J3.4 U1.68 | length 1640
  Top w8: U1.68 2223.74,598.74 2253.74,628.74
  Top w10: 2253.74,628.74 2683.74,628.74 2760,705 2845,705 2950,810 3000,810 3070,880 3580,880 J3.4
RD9: J3.5 U1.69 | length 1742.5
  Top w8: v1(2115,560) 2115,585 2144.49,614.49 U1.69
  Bottom w8: v1(2115,560) 2115,580 2243,708 2348,708 2375,735
  Bottom w10: 2375,735 3165,735 3350,920 3520,920 J3.5
RD10: J3.6 U1.70 | length 1427
  Top w8: U1.70 2225.24,630.24 2245.24,650.24
  Top w10: 2245.24,650.24 2675.24,650.24 2750,725 2835,725 2940,830 2990,830 3060,900 3400,900 J3.6
RD11: J3.7 U1.71 | length 1646.3
  Top w8: v1(2060,555) 2140,635 2140,640 2145.98,645.98 U1.71
  Bottom w8: v1(2060,555) 2065,555 2234,724 2334,724 2365,755
  Bottom w10: 2365,755 3155,755 J3.7
RD12: J3.14 U1.79 | length 911
  Top w8: v1(2035,680) 2061.73,706.73 U1.79
  Bottom w8: v1(2035,680) 2060,705 2060,775 2165,880 2580,880 J3.14
RD13: J3.15 U1.80 | length 733.2
  Top w8: v1(2030,725) 2045.98,740.98 U1.80
  Bottom w8: v1(2030,725) 2030,770 2160,900 2500,900 J3.15
RD14: J4.26 U1.47 | length 851.2
  Top w8: v1(2010,380) 2010,355 2061.73,303.27 U1.47
  Bottom w10: v1(2010,380) 2010,350 2240,120 2520,120 J4.26
RD15: J4.27 U1.48 | length 862.9
  Top w8: v1(2055,360) 2055,339.96 2077.48,317.48 U1.48
  Bottom w10: v1(2055,360) 2055,335 2250,140 2600,140 J4.27
RE0: J3.26 LED3.C U1.93 | length 2389.6
  Top w8: v1(1835,670) 1841.26,676.26 U1.93
  Top w10: v1(750,545) 750,430 780,400 940,400 965,375 1070,375 1090,355 LED3.C
  Bottom w10: v1(750,545) 750,600 810,660 1330,660 1380,610 1785,610 1835,660 v1(1835,670) 1835,730 1750,815 1625,815 1555,815 1470,900 J3.26
RE1: J3.27 LED2.C U1.94 | length 2249
  Top w8: v1(1800,710) 1825.51,735.51 U1.94
  Top w10: v1(715,510) 715,435 770,380 910,380 940,350 LED2.C
  Bottom w10: v1(715,510) 715,600 795,680 1340,680 1390,630 1770,630 1800,660 v1(1800,710) 1725,785 1555,785 J3.27
RE2: J3.31 LED1.C U1.98 | length 2499.6
  Top w8: 1750,850 1762.52,837.48 U1.98 v1@1762.52,672.52
  Top w10: v1(680,545) 680,430 760,350 795,350 794.53,349.53 LED1.C ; J3.31 1090,850 1750,850 ; v1@1762.52,672.52 v1(1765,675)
  Bottom w10: v1(680,545) 680,605 775,700 1350,700 1400,650 1740,650 v1(1765,675)
RE3: J3.32 U1.99 USB.C | length 2485.2
  Top w8: 1010,830 1740,830 1746.77,823.23 U1.99 1746.77,726.77 v1(1730,710)
  Top w10: USB.C 640,360 645,365 v1(645,510) ; J3.32 1010,830
  Bottom w10: v1(645,510) 645,605 760,720 1360,720 1410,670 1690,670 v1(1730,710)
RE4: J3.33 U1.100 | length 1044.1
  Top w8: 1005,805 1720,805 1731.02,793.98 U1.100
  Top w10: J3.33 820,920 890,920 1005,805
RE5: J3.35 U1.3 | length 1233.7
  Top w8: 1605,735 1605,690 1617.52,677.48 U1.3
  Top w10: J3.35 620,920 790,920 810,900 880,900 995,785 1555,785 1605,735
RE6: J3.36 R5.2 U1.4 USER.3 USER.4 | length 1969.4
  Top w8: 1585,725 1585,680 1603.27,661.73 U1.4
  Top w10: J3.36 540,900 780,900 800,880 870,880 955,795 ; R5.2 559.41,585 v1(560,585) ; v1(595,690) 595,775 615,795 USER.4 USER.3 955,795 ; 1585,725 1545,765 985,765 955,795
  Bottom w10: v1(560,585) 595,620 v1(595,690)
RE7: J3.37 PROGRAM.3 PROGRAM.4 R3.2 U1.5 | length 2120.5
  Top w8: 1565,715 1565,670 1589.02,645.98 U1.5
  Top w10: v1(370,725) 370,795 ; J3.37 320,920 PROGRAM.4 370,795 ; R3.2 454.41,545.59 v1(470,530) ; PROGRAM.3 370,795 ; v1(650,725) 670,745 1535,745 1565,715
  Bottom w10: v1(470,530) 470,620 370,720 v1(370,725) v1(650,725)
RE8: J4.8 U1.18 | length 1040
  Top w8: 1320,220 1541.26,441.26 U1.18
  Top w10: J4.8 820,120 890,120 910,140 980,140 1000,160 1070,160 1090,180 1160,180 1200,220 1320,220
RE9: J4.9 U1.19 | length 933.5
  Top w8: 1330,200 1555.51,425.51 U1.19
  Top w10: J4.9 920,120 990,120 1010,140 1080,140 1100,160 1170,160 1210,200 1330,200
RF0: J3.20 U1.87 | length 423.4
  Top w8: v1(1915,725) 1935.75,745.75 U1.87
  Bottom w10: v1(1915,725) 1915,895 1940,920 1995,920 2045,970 J3.20
RF1: J3.21 U1.88 | length 206.9
  Top w8: U1.88 1920,920 J3.21
RF2: J4.30 U1.52 | length 935.5
  Top w8: U1.52 2223.23,346.77 2235,335 2235,310 v1(2225,300)
  Bottom w10: v1(2225,300) 2260,265 2355,265 2440,180 2860,180 J4.30
RF4: J4.28 U1.49 | length 811.9
  Top w8: U1.49 2093.23,293.23 2100,300 2140,300 v1(2150,290)
  Bottom w10: v1(2150,290) 2280,160 2680,160 J4.28
RF5: J4.29 U1.50 | length 838.3
  Top w8: U1.50 2108.98,256.02 2120,245
  Top w10: 2120,245 2255,245 2315,185 2460,185 2525,120 2820,120 J4.29
RF8: J4.31 U1.53 | length 1022
  Top w8: U1.53 2237.48,362.52 2275,325 v1(2275,310)
  Bottom w10: v1(2275,310) 2300,285 2365,285 2450,200 2950,200 3070,80 J4.31
RF12: J4.21 U1.40 | length 371.2
  Top w8: v1(1940,315) 1951.5,303.5 U1.40
  Bottom w10: v1(1940,315) 1955,315 2070,200 J4.21
RF13: J4.20 U1.39 | length 200.4
  Top w8: U1.39 1935.75,219.25 1945,210 1945,95 J4.20
RG0: J3.23 U1.90 | length 255.8
  Top w8: J3.23 1795,970 1845,920 1855,920 1888.5,886.5 U1.90
RG1: J3.22 U1.89 | length 200.4
  Top w8: J3.22 1904.25,935.75 U1.89
RG6: J4.2 U1.10 | length 2254
  Top w8: U1.10 1832.24,567.24 v1(1850,585)
  Top w10: J4.2 220,120 v1(220,350)
  Bottom w10: v1(220,350) 315,445 475,445 505,415 1460,415 1615,570 1835,570 v1(1850,585)
RG7: J4.3 U1.11 | length 2242.1
  Top w8: U1.11 1888.5,551.5 v1(1890,550)
  Top w10: J4.3 v1(270,350)
  Bottom w10: v1(270,350) 345,425 465,425 495,395 1470,395 1625,550 v1(1890,550)
RG8: J4.4 U1.12 | length 2149.9
  Top w8: U1.12 1834.25,535.75 v1(1855,515)
  Top w10: v1(325,350) 380,295 380,80 J4.4
  Bottom w10: v1(325,350) 380,405 455,405 485,375 1480,375 1635,530 1840,530 v1(1855,515)
RG9: J4.6 U1.14 | length 1926.4
  Top w8: U1.14 1765.75,504.25 v1(1795,475)
  Top w10: v1(430,350) 430,210 J4.6
  Bottom w10: v1(430,350) 445,335 1500,335 1650,485 1785,485 v1(1795,475)
RG12: J3.29 U1.96 | length 749.3
  Top w8: 1770,890 1794.02,865.98 U1.96
  Top w10: J3.29 1250,890 1770,890
RG13: J3.30 U1.97 | length 825.2
  Top w8: 1760,870 1778.27,851.73 U1.97
  Top w10: J3.30 1170,870 1760,870
RG14: J3.28 U1.95 | length 673.4
  Top w8: 1780,910 1809.76,880.24 U1.95
  Top w10: J3.28 1330,910 1780,910
RG15: J3.34 U1.1 | length 1106.1
  Top w8: v1(1640,745) 1640,725 1656.02,708.98 U1.1
  Bottom w10: J3.34 835,805 1460,805 1500,765 1620,765 v1(1640,745)
USBID: J6.4 J8.ID R9.1 U1.51 | length 2906.2
  Top w8: v1(2030,470) 2030,415 2050,395 2080,395 2090,385 2090,340 2105,325 2140,325 2146.02,331.02 U1.51 2183.78,286.22 ; R9.1 R9.1@2295,265
  Top w10: 2183.78,286.22 2205,265 R9.1@2295,265 ; v1(3905,375) 3945,375 4018.5,301.5 J8.ID
  Bottom w8: v1(2030,470) 2030,495 2040,505 2130,505 2155,530 2155,595 2252,692 2603,692 2625,670
  Bottom w10: 2625,670 3250,670 3305,725 3615,725 J6.4 3745,595 3745,480 3850,375 v1(3905,375)
VBUS: C3.1 J6.1 J7.VBUS J8.VBUS JP1.2 PWR_SEL.3 PWR_SEL.6 U1.54 | length 3806.3
  Top w8: v1(2125,360) 2143.27,378.27 U1.54
  Top w10: PWR_SEL.6@3473.43,571.57 PWR_SEL.6@3475,570 ; PWR_SEL.6@3475,565 PWR_SEL.6@3475,570 ; PWR_SEL.6@3480,560 3495,560 v1(3520,535) ; C3.1@3910,230 C3.1 ; PWR_SEL.6@3475,570 3473.78,568.78 PWR_SEL.6 3471.22,568.78 3470,570 PWR_SEL.6@3475,570
  Top w16: PWR_SEL.6 3477.2,565 3480,565 PWR_SEL.6@3480,560 ; PWR_SEL.6@3473.43,571.57 PWR_SEL.3 ; v1(3920,180) 3910.59,189.41 C3.1 3970,230 3992.99,207.01 J8.VBUS
  Bottom w10: v1(2125,360) 2250,485 2250,565 2290,605 2360,605 2385,580 2385,540 2510,415 2605,415 2635,385 3555,385
  Bottom w16: v1(3520,535) 3520,420 3555,385 3570,370 ; JP1.2 3570,370 ; v1(3920,180) 3920,230 ; J7.VBUS 4221.89,638.11 4265,595 4265,395 4100,230 3920,230 ; 3570,370 J6.1 3810,230 3920,230
VIN_RAW: C1.A D1.C U3.3 | length 809.8
  Top w10: U3.3@3128,498 U3.3 3110,497 3110,370 3085,345 3085,310 3070,295 3000,295 2975.12,270.12 C1.A@2935.24,270.12 ; C1.A@2935.24,270.12 ccw(c2935.24,270) C1.A C1.A@2935.24,270.12
  Top w16: U3.3@3128,498 v1(3170,540) ; D1.C 3449.13,463.78 3449.13,489.13 v1(3450,490)
  Bottom w16: v1(3170,540) 3220,490 v1(3450,490)
VPP: J4.5 J5.1 R10.2 RESET.3 RESET.4 U1.13 | length 3048.2
  Top w8: U1.13 1800,520 1845,475 v1(1890,475)
  Top w10: v1(250,690) 250,530 285,495 320,495 R10.2 320,400 315,395 RESET.4 380,395 ; J4.5 405,135 405,325 v1(380,350) 380,395 ; RESET.3 380,395
  Bottom w10: J5.1 v1(250,690) ; v1(380,350) 380,370 395,385 445,385 475,355 1490,355 1645,510 1810,510 1845,475 v1(1890,475)
pads on no net: J2.NC1 J2.NC2 J7.P$5 J7.P$6 Q1.2 Q1.4 U2.4 U3.4

## Polygon pours and split planes (outlines as drawn)
GND on Top "Polygon_1_Net_GND" (solid, remove dead copper, pour order 1): 15,1025 15,15 4375,15 4375,1025
3.3V on Bottom "Polygon_1_Net_3.3V" (solid, remove dead copper, pour order 0): 15,15 15,1025 4375,1025 4375,15

## Keep-outs
Keep-Out Layer:
  the board outline again, w8

## Other copper
Bottom:
  text "4/1/2010" at 865,150 h34

## Silkscreen, mask and mechanical layers (free items; w line width, h text height)
Dimension:
  the board outline again, w8
tValues:
  text "LM1117" at 2940,800 h34
  text "LM1117" at 2585,445 h34
tPlace:
  lines w10: 20,920 20,420 205,420 260,475 260,780 190,850
  text "v26" at 4075,955 h34
  text "C3" at 139.79,889.9 h34 r315
  text "5V" at 3848.35,886.01 h34
  text "GND" at 3939.36,886.01 h34
  text "C1" at 288.99,879.68 h34 r90
  text "E1" at 1383.99,879.68 h34 r90
  text "G1" at 1888.99,879.68 h34 r90
  text "D1" at 2983.99,879.68 h34 r90
  text "F1" at 2016.99,879.18 h34 r90
  text "\D13" at 2515,875 h34
  text "D12" at 2640,875 h34
  text "C2" at 233.99,868.35 h34 r90
  text "E7" at 383.99,868.35 h34 r90
  text "E6" at 483.99,868.35 h34 r90
  text "E5" at 583.99,868.35 h34 r90
  text "E4" at 783.99,868.35 h34 r90
  text "E3" at 883.99,868.35 h34 r90
  text "E2" at 983.99,868.35 h34 r90
  text "E0" at 1483.99,868.35 h34 r90
  text "A7" at 1583.99,868.35 h34 r90
  text "A6" at 1683.99,868.35 h34 r90
  text "G0" at 1783.99,868.35 h34 r90
  text "F0" at 2083.99,868.35 h34 r90
  text "D7" at 2183.99,868.35 h34 r90
  text "D6" at 2283.99,868.35 h34 r90
  text "D5" at 2383.99,868.35 h34 r90
  text "D4" at 2483.99,868.35 h34 r90
  text "D3" at 2803.99,868.35 h34 r90
  text "D2" at 2883.99,868.35 h34 r90
  text "D0" at 3283.99,868.35 h34 r90
  text "D9" at 3583.99,868.35 h34 r90
  text "D8" at 3683.99,868.35 h34 r90
  text "D11" at 3385.59,858.72 h30.6 r90
  text "G15" at 680.59,848.52 h30.6 r90
  text "D10" at 3485.59,848.52 h30.6 r90
  text "G13" at 1083.99,840.03 h34 r90
  text "G12" at 1183.99,840.03 h34 r90
  text "G14" at 1283.99,840.03 h34 r90
  text "C14" at 3083.99,840.03 h34 r90
  text "C13" at 3183.99,840.03 h34 r90
  text "VPP" at 113.54,836.46 h34 r315
  text "3.3V" at 3783.99,806.04 h34 r90
  text "-" at 3930,785 h34
  text "MX460" at 985,740 h59.5
  text "3.3V" at 120,725 h34
  text "GND" at 3610,720 h34 r90
  text "+" at 3930,705 h34
  text "GND" at 120,650 h34
  text "ID" at 3730,650 h34
  text "32KHz" at 2525,645 h34
  text "EXT" at 3225,630 h34 r90
  text "USB" at 3565,630 h34 r90
  text "J1" at 3840,610 h34
  text "PROG" at 355,565 h34
  text "USER" at 700,565 h34
  text "J2" at 4095,555 h34
  text "PGD" at 120,550 h34
  text "D+" at 3730.5,547 h34
  text "J6" at 3610,535 h34 r90
  text "PWR_SEL" at 3150,470 h34
  text "PGC" at 120,450 h34
  text "D-" at 3729.5,445 h34
  text "RESET" at 340,430 h34
  text "8MHz" at 2345,360 h34 r90
  text "B2" at 120,350 h34
  text "VBUS" at 3730,345 h34
  text "3.3" at 3125,330 h34
  text "5" at 3255,330 h34
  text "GND" at 3320,330 h34
  text "Host" at 3455,330 h34
  text "USB" at 610,270 h34 r90
  text "PWR" at 1215,270 h34 r90
  text "LED1" at 765,260 h34 r90
  text "LED2" at 915,260 h34 r90
  text "LED3" at 1065,260 h34 r90
  text "B1" at 120,250 h34
  text "JP1" at 3010,250 h34
  text "schmalzhaus.com/UBW32" at 560,210 h34
  text "USB" at 3690,210 h34 r90
  text "B0" at 120,195 h34
  text "4" at 3585,180 h34 r90
  text "A1" at 1835,170 h34
  text "A1" at 3644.68,126.01 h34
  text "5" at 3697.34,126.01 h34
  text "G6" at 230,120 h34 r90
  text "G7" at 290,120 h34 r90
  text "G8" at 390,120 h34 r90
  text "VPP" at 490,120 h34 r90
  text "G9" at 590,120 h34 r90
  text "A0" at 690,120 h34 r90
  text "E8" at 790,120 h34 r90
  text "E9" at 890,120 h34 r90
  text "B5" at 990,120 h34 r90
  text "B4" at 1090,120 h34 r90
  text "B3" at 1190,120 h34 r90
  text "A9" at 1290,120 h34 r90
  text "A10" at 1390,120 h34 r90
  text "B8" at 1490,120 h34 r90
  text "B9" at 1590,120 h34 r90
  text "B10" at 1690,120 h34 r90
  text "B11" at 1785,120 h30.6 r90
  text "F13" at 1985,120 h30.6 r90
  text "F12" at 2085,120 h30.6 r90
  text "B12" at 2110,120 h34
  text "B13" at 2290,120 h34 r90
  text "B14" at 2390,120 h34 r90
  text "B15" at 2490,120 h34 r90
  text "D14" at 2590,120 h34 r90
  text "D15" at 2690,120 h34 r90
  text "F4" at 2790,120 h34 r90
  text "F5" at 2890,120 h34 r90
  text "F2" at 2990,120 h34 r90
  text "F8" at 3090,120 h34 r90
  text "A2" at 3190,120 h34 r90
  text "A3" at 3290,120 h34 r90
  text "A4" at 3390,120 h34 r90
  text "A5" at 3490,120 h34 r90
  text "A1" at 3585,120 h34 r90
  text "3.3V" at 3790,120 h34 r90
  text "5V" at 3890,120 h34 r90
  text "GND" at 3990,120 h34 r90
  text "C4" at 140,115 h34 r45
  text "J8" at 4145,50 h34
bPlace:
  lines w10: 3620,820 3620,320 ; 3625,820 3720,820 3720,320 3620,320 ; 3220,220 3220,320 ; 3220,220 3320,220 ; 3220,220 3120,220 3120,320 3220,320 ; 3220,320 3320,320 ; 3320,220 3320,320 ; 3320,220 3620,220 3620,320 ; 3320,320 3620,320 ; 20,420 20,920 120,920 120,420 20,420 ; 3820,670 3920,670 3920,870 3820,870 3820,670
  text "USB" at 3700.64,841.01 h34
  text "-" at 3960,800 h34
  text "GND" at 3570,720 h34 r270
  text "+" at 3960,700 h34
  text "ICSP" at 136.01,681.04 h34 r270
  text "ID" at 3790,650 h34
  text "J1" at 3905,610 h34
  text "J6" at 3560,560 h34 r270
  text "D+" at 3799.5,552 h34
  text "J7" at 4010,500 h34 r270
  text "D-" at 3800.5,450 h34
  text "WWW.SCHMALZHAUS.COM/UBW32" at 2620,355 h56.1
  text "VBUS" at 3875,350 h34
  text "3.3" at 3215,330 h34
  text "5" at 3285,330 h34
  text "GND" at 3420,330 h34
  text "Host" at 3585,330 h34
  text "JP1" at 3060,220 h34 r270

## Text inside footprints (layer, text, board x,y; h text height)
J2: tDocu "-" at 4045,885 h42.5 r270; tDocu "+" at 4045,685 h42.5 r270